# EAGLE board electric_circuit (EAGLE 9.7.0)

Size 202.3 x 128.21 mm. Coordinates in mm from the lower left corner, seen from the top.
Outline: 0,0 202.3,0 202.3,128.21 0,128.21 0,0
Copper layers (1*16): Top 0.035mm / dielectric 1.5mm / Bottom 0.035mm
Design rules "default": minimum track width 6mil, minimum drill 0.35mm, track to track 6mil, track to pad 6mil, pad to pad 6mil, via to via 6mil, smd to smd 6mil, copper to edge 40mil, drill to drill 6mil, minimum pad ring 10mil, minimum via ring 8mil, stop-mask expansion 4mil, vias tented up to drill 0mil, thermal gap 10mil

## Footprints (pad centres in the part's own frame; a part is rotated, then mirrored left to right if it is on the bottom)
HA-06-SM065 = drill 1 pad 1.676: 1 -2.54,-2.54; 2 0,2.54; 3 2.54,-2.54
RESAD1016W63L850D250B = drill 0.83 pad 1.43: 1 -5.08,0; 2 5.08,0
SWITCH-MOMENTARY-PTH-6.5MM = drill 1.016 pad 1.88: 1 -3.251,2.261; 2 3.251,2.261; 3 -3.251,-2.261; 4 3.251,-2.261
ARDUINO-UNO-R3-SHIELD = drill 1.016 pad 1.88: 3.3V 24.13,-2.54; 5V 24.13,0; A0 24.13,12.7; A1 24.13,15.24; A2 24.13,17.78; A3 24.13,20.32; A4 24.13,22.86; A5 24.13,25.4; AREF -24.13,-13.97; D2 -24.13,20.32; D3 -24.13,17.78; D4 -24.13,15.24; D5 -24.13,12.7; D6 -24.13,10.16; D7 -24.13,7.62; D8 -24.13,3.81; D9 -24.13,1.27; D10 -24.13,-1.27; D11 -24.13,-3.81; D12 -24.13,-6.35; D13 -24.13,-8.89; GND@0 24.13,2.54; GND@1 24.13,5.08; GND@2 -24.13,-11.43; IOREF 24.13,-7.62; NC 24.13,-10.16; RES 24.13,-5.08; RX -24.13,25.4; SCL -24.13,-19.05; SDA -24.13,-16.51; TX -24.13,22.86; VIN 24.13,7.62
JHD-162A = drill 1.016 long: 1 -19.05,0; 2 -16.51,0; 3 -13.97,0; 4 -11.43,0; 5 -8.89,0; 6 -6.35,0; 7 -3.81,0; 8 -1.27,0; 9 1.27,0; 10 3.81,0; 11 6.35,0; 12 8.89,0; 13 11.43,0; 14 13.97,0; 15 16.51,0; 16 19.05,0

## Placement (x,y rotation side)
RPOTPOTENCIOMETRE_BRIGHNESS_1  250k  [HA-06-SM065]  140.09,94.62 0 top
RRESISTANCE_BOUTON_GAUCHE  220  [RESAD1016W63L850D250B]  127.39,81.92 90 top
RRESISTANCE_DROITE  220  [RESAD1016W63L850D250B]  195.97,81.92 90 top
RRESISTANCE_ECRAN  220  [RESAD1016W63L850D250B]  150.25,79.38 90 top
S1  SWITCH_MOMENTARY  [SWITCH-MOMENTARY-PTH-6.5MM]  124.85,98.43 90 top
S2  SWITCH_MOMENTARY  [SWITCH-MOMENTARY-PTH-6.5MM]  193.43,98.43 90 top
U1  ARDUINO-UNO-R3-SHIELD  [ARDUINO-UNO-R3-SHIELD]  65.57,98.36 270 top
U2  LCD-16X2JHD-162A  [JHD-162A]  30.73,36.63 0 top

## Library data of the parts
RPOTPOTENCIOMETRE_BRIGHNESS_1 RRESISTANCE_BOUTON_GAUCHE RRESISTANCE_DROITE RRESISTANCE_ECRAN S1 S2 U1 U2 = Tinkercad

## Nets
U1_5V: RPOTPOTENCIOMETRE_BRIGHNESS_1.1 RRESISTANCE_ECRAN.1 S1.1 S1.2 S2.1 S2.2 U1.5V U2.2
U1_D2: U1.D2 U2.14
U1_D3: U1.D3 U2.13
U1_D4: U1.D4 U2.12
U1_D5: U1.D5 U2.11
U1_D8: RRESISTANCE_BOUTON_GAUCHE.2 S1.3 S1.4 U1.D8
U1_D9: RRESISTANCE_DROITE.2 S2.3 S2.4 U1.D9
U1_D11: U1.D11 U2.6
U1_D12: U1.D12 U2.4
U1_GND: RPOTPOTENCIOMETRE_BRIGHNESS_1.3 RRESISTANCE_BOUTON_GAUCHE.1 RRESISTANCE_DROITE.1 U1.GND@0 U1.GND@1 U1.GND@2 U2.1 U2.5 U2.16
U2_LED+: RRESISTANCE_ECRAN.2 U2.15
U2_VO: RPOTPOTENCIOMETRE_BRIGHNESS_1.2 U2.3

## Tracks (layer width: path | path; a pad name or v marks a point on that pad's centre or on a via)
U1_5V  (7 unrouted)
U1_D2  (1 unrouted)
U1_D3  (1 unrouted)
U1_D4  (1 unrouted)
U1_D5  (1 unrouted)
U1_D8  (3 unrouted)
U1_D9  (3 unrouted)
U1_D11  (1 unrouted)
U1_D12  (1 unrouted)
U1_GND  (8 unrouted)
U2_LED+  (1 unrouted)
U2_VO  (1 unrouted)